# Altium PCB Thread_T21.PcbDoc
Units mm, origin at the board's own origin, x right, y up, seen from the top; angles counter-clockwise.
Board outline 100 x 100 mm, 2 copper layers (Top Layer, Bottom Layer); 49 components, 54 nets, 194 pads, 46 vias.
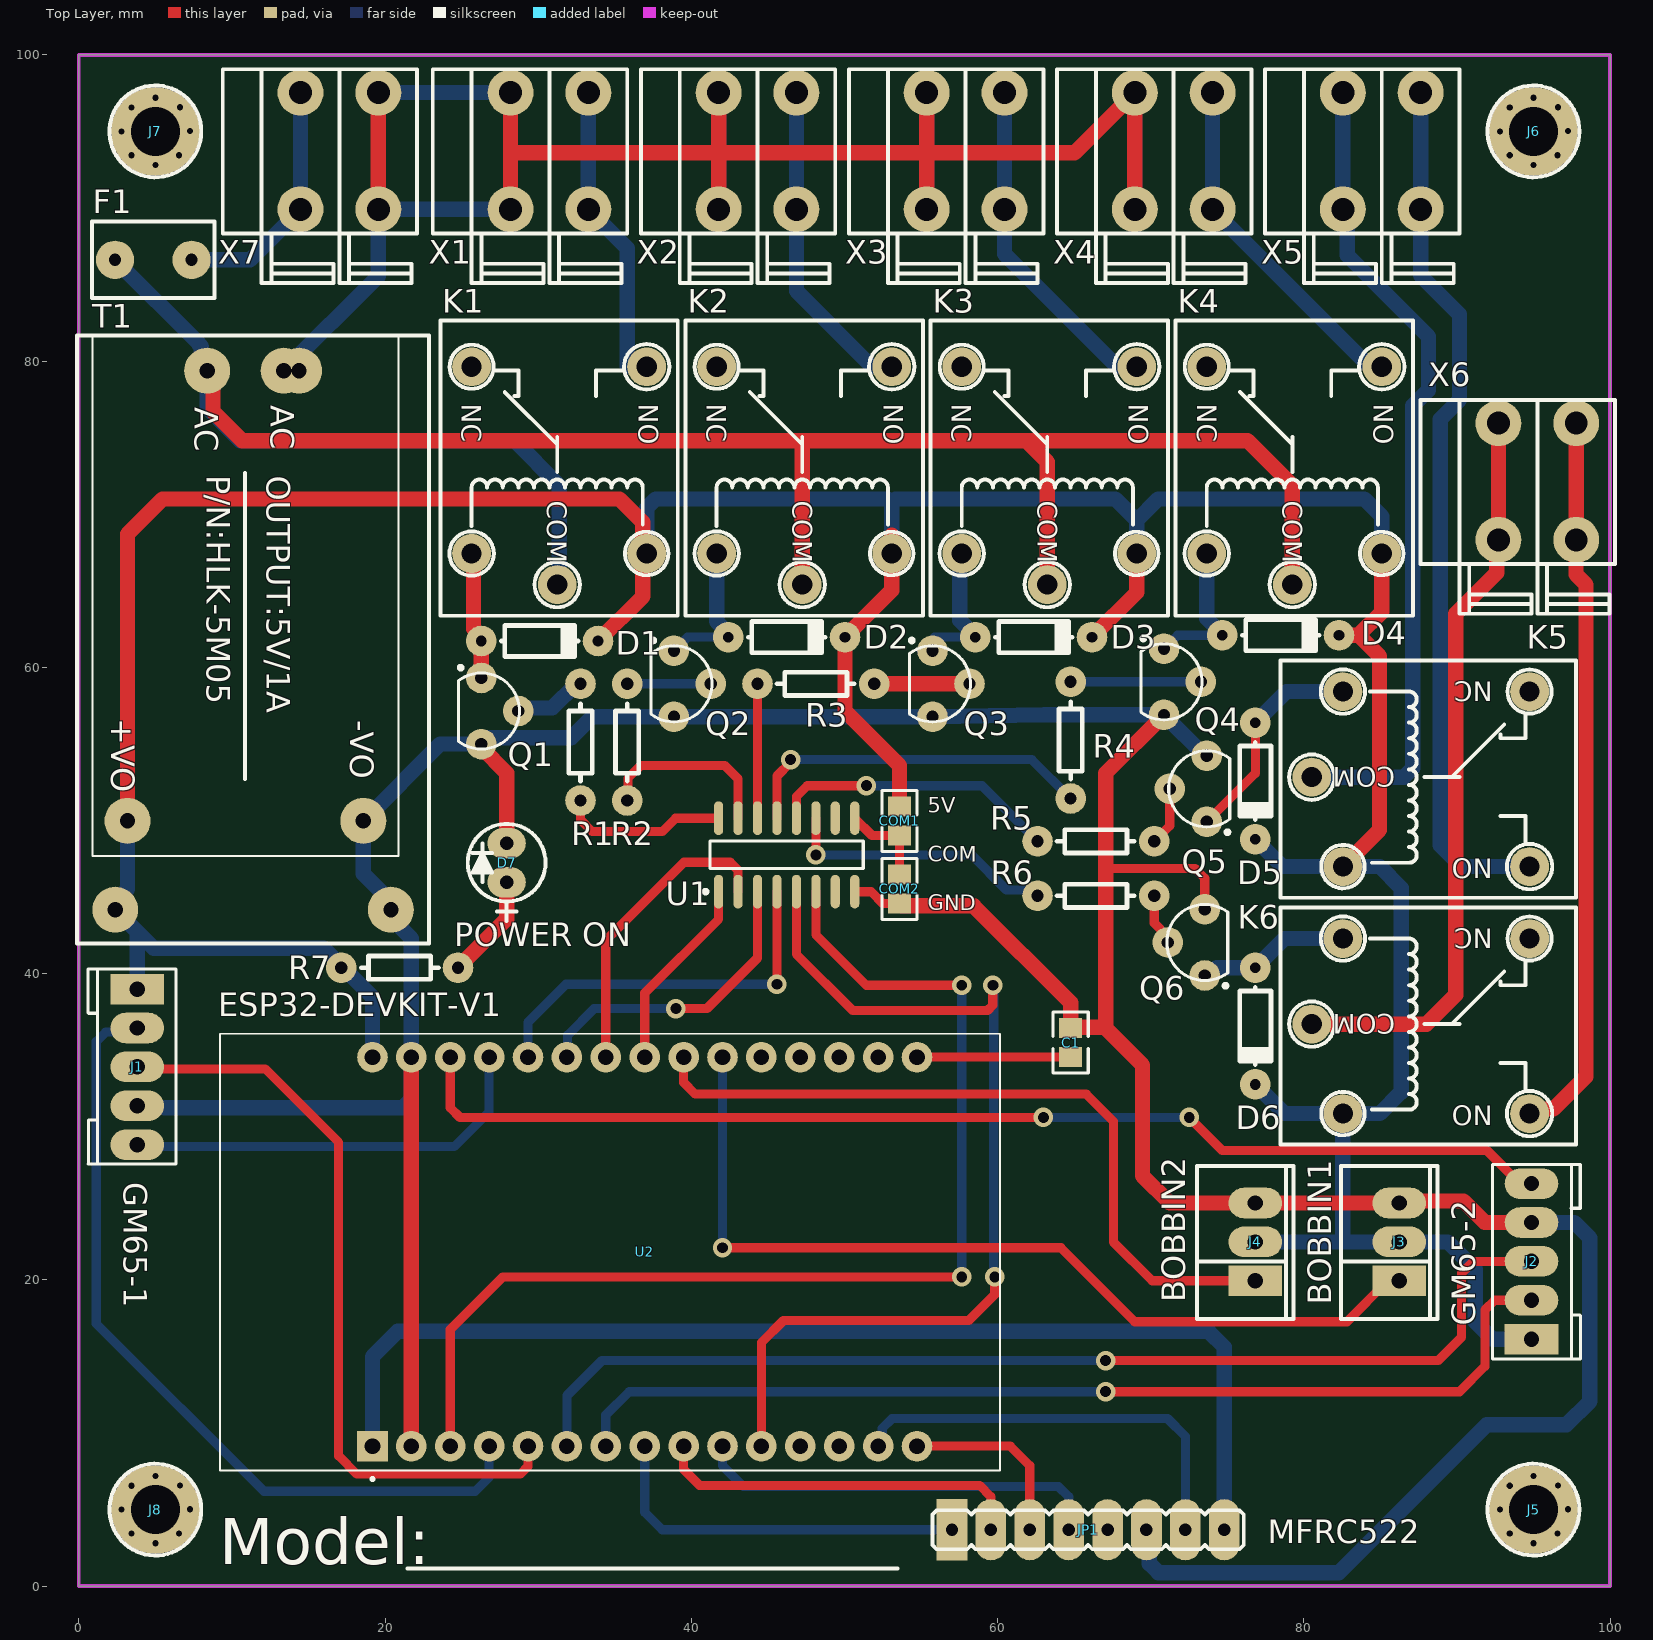
[diagram p0: Top Layer view]
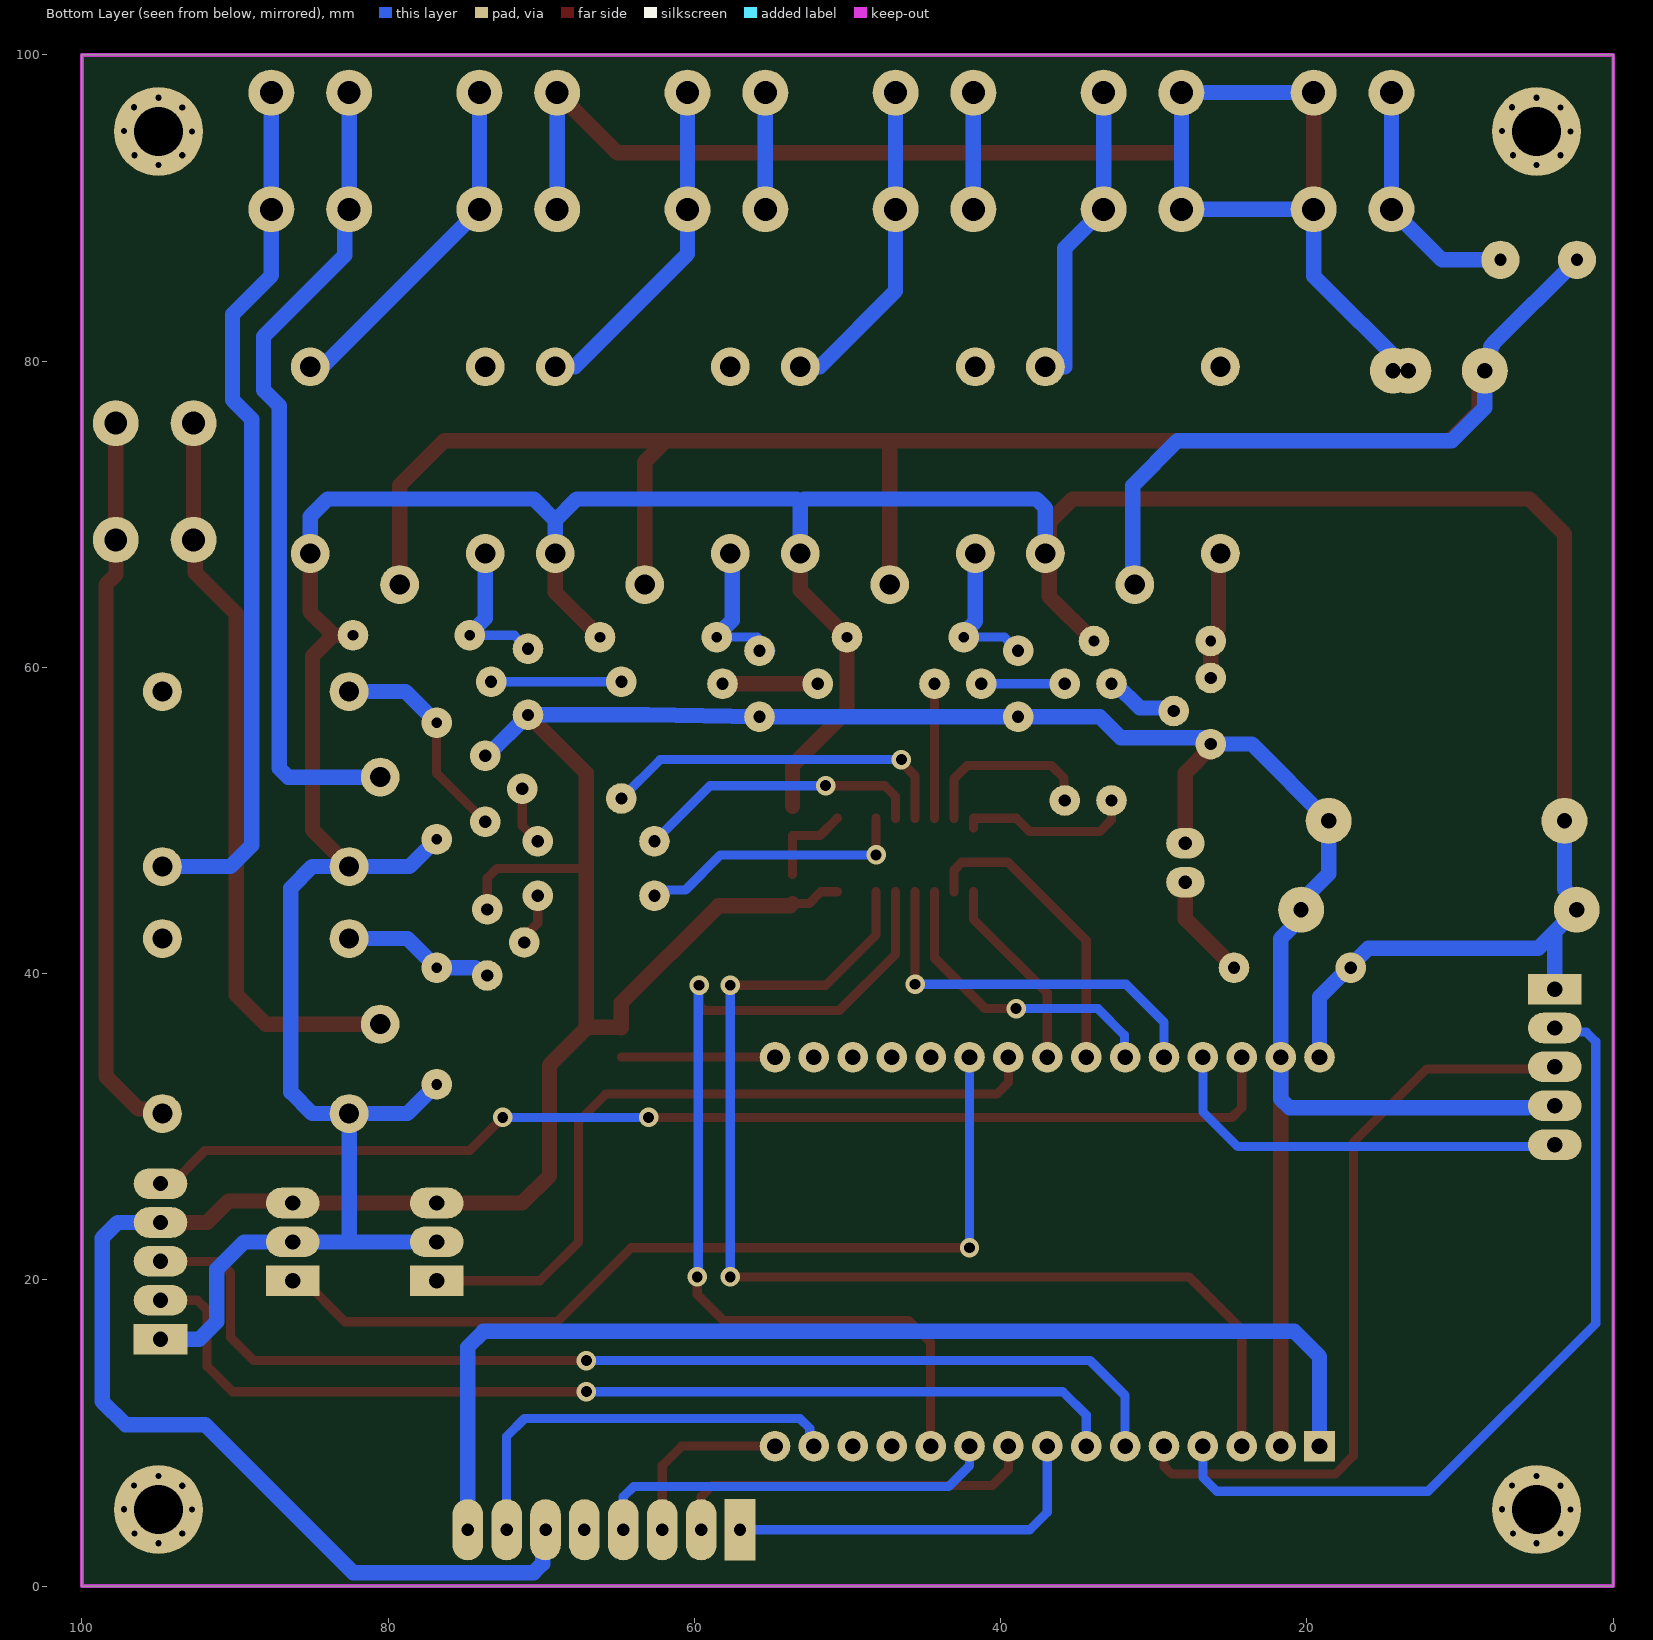
[diagram p1: Bottom Layer view, seen from below]
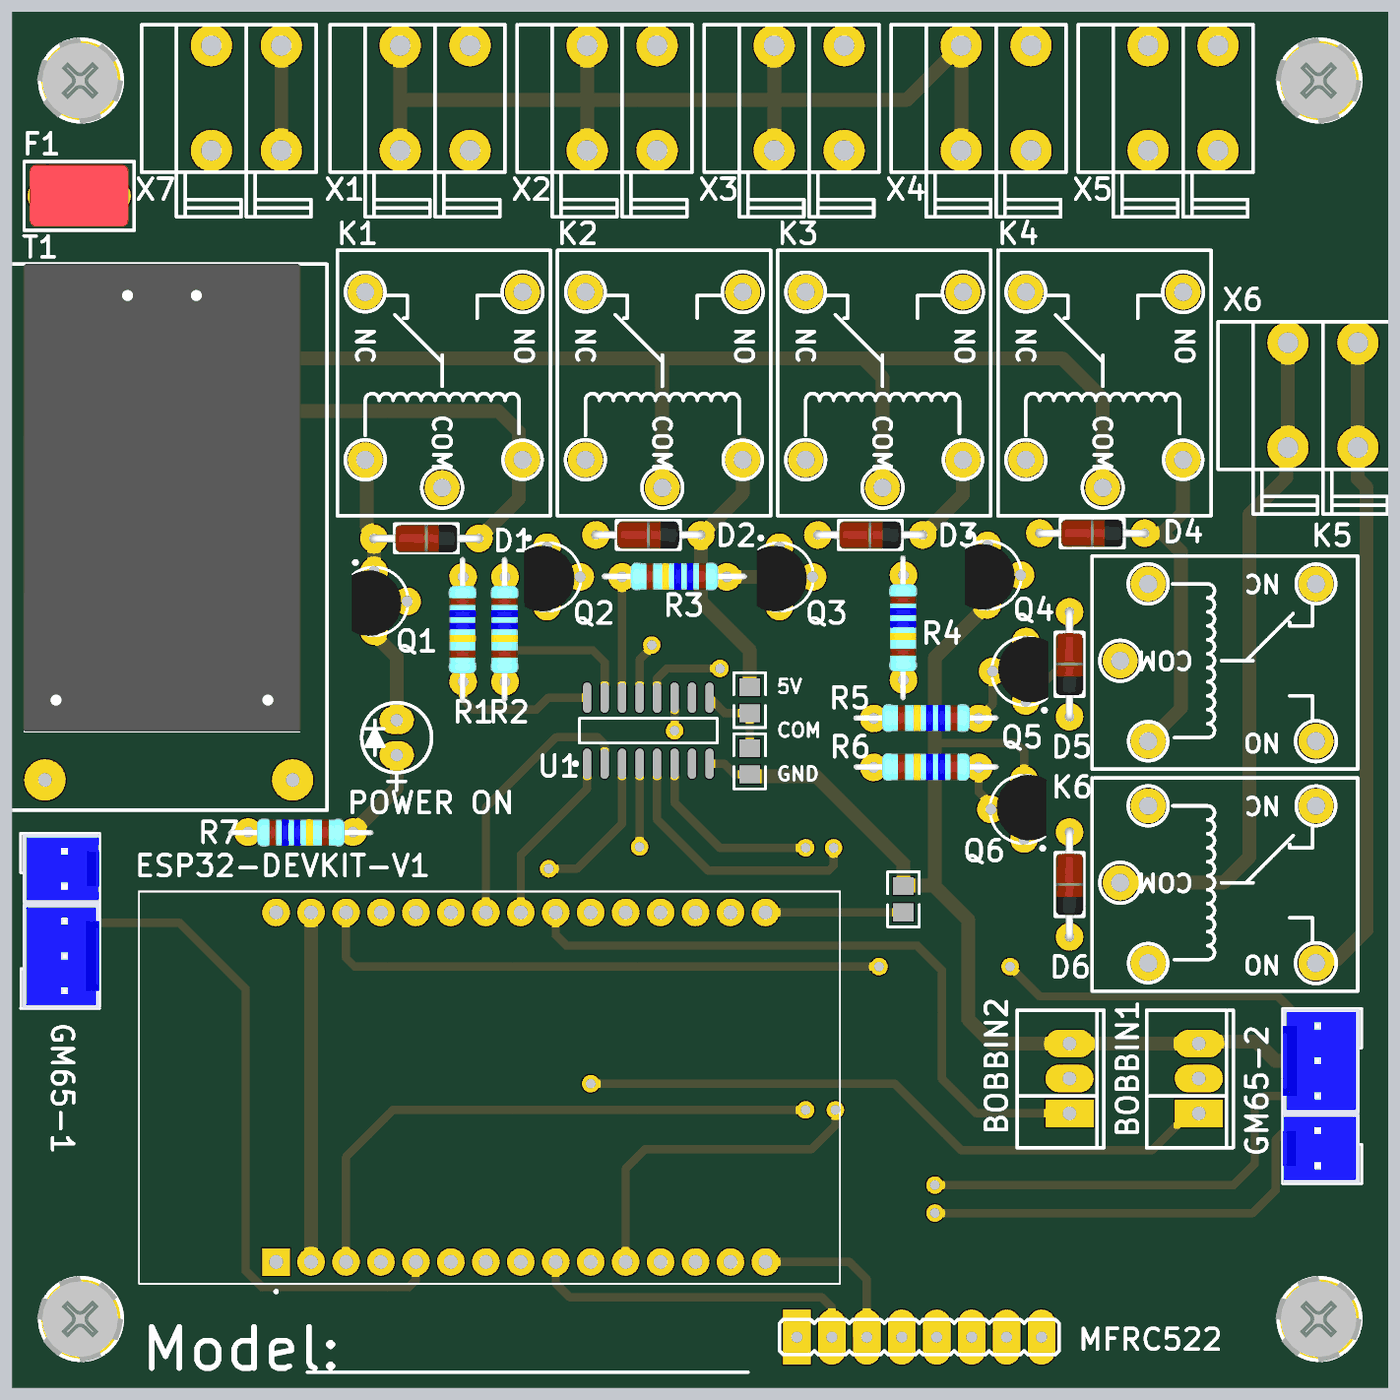
[diagram p2: 3D render of the assembled board from above, using the file's embedded part models]

## Layer stack, top to bottom
Top Solder: solder mask 0.0102, Solder Resist, Dk 3.5
Top Layer: signal copper 0.0356
Dielectric 1: dielectric 0.32, FR-4, Dk 4.8
Bottom Layer: signal copper 0.0356
Bottom Solder: solder mask 0.0102, Solder Resist, Dk 3.5

## Board outline
0,0 0,100 100,100 100,0

## Design rules (kind name [scope] priority, off if disabled: settings)
Clearance AC_CLEAR [InNetClass('AC_POWER')] p1: gap=0.5 ignorepadtopadclearanceinfootprint=FALSE
Clearance [All] p2: gap=0.254 ignorepadtopadclearanceinfootprint=FALSE
PolygonConnect [All] p1: connectstyle=Relief reliefconductorwidth=0.254 reliefentries=4 polygonreliefangle="90 Angle" airgapwidth=0.254
RoutingVias [All] p1: holewidth=0.711 width=1.27 viastyle="Through Hole" minholewidth=0.711 minwidth=1.27 maxholewidth=0.711 maxwidth=1.27
SolderMaskExpansion [All] p1: expansion=0.102 istentingtop=FALSE
Width AC [InNetClass('AC_POWER')] p1: maxlimit=1.2 minlimit=0.254 preferedwidth=1 minimp=50.000000 maximp=50.000000 favimp=50.000000
Width DQ [InNetClass('DQ')] p2: maxlimit=1 minlimit=0.254 preferedwidth=1 minimp=50.000000 maximp=50.000000 favimp=50.000000
Width DC [InNetClass('DC_POWER')] p3: maxlimit=2 minlimit=0.254 preferedwidth=1 minimp=50.000000 maximp=50.000000 favimp=50.000000
Width all [All] p4: maxlimit=1 minlimit=0.254 preferedwidth=0.6 minimp=50.000000 maximp=50.000000 favimp=50.000000
30 further rules are at their usual default settings.

## Components (designator, comment, footprint, x,y, rotation, side; value= is the part's Value field where it differs from the comment)
C1 "1n" CR2012-0805 64.77,35.503 r270 top
COM1 "" CR2012-0805 53.594,49.968 r90 top value=1n
COM2 "" CR2012-0805 53.594,45.536 r270 top value=1n
D1 "1N4148" D4148 26.289,61.722 r180 top
D2 "1N4148" D4148 42.418,61.976 r180 top
D3 "1N4148" D4148 58.547,61.976 r180 top
D4 "1N4148" D4148 74.676,62.103 r180 top
D5 "1N4148" D4148 76.835,56.388 r90 top
D6 "1N4148" D4148 76.835,40.386 r90 top
D7 "POWER ON" LED 27.94,47.244 r90 top
F1 "1A" CAP5W 7.366,86.584 r0 top locked
J1 "GM65-1" CONNECT_2.54_(5) 3.81,38.989 r270 top
J2 "GM65-2" CONNECT_2.54_(5) 94.869,16.129 r90 top
J3 "BOBBIN1" CONNECT_W(3) 86.233,19.939 r90 top value=J3
J4 "BOBBIN2" CONNECT_W(3) 76.835,19.939 r90 top value=J3
J5 "M3" PAD 95,5 r0 top locked
J6 "M3" PAD 95,95 r0 top locked
J7 "M3" PAD 5,95 r0 top locked
J8 "M3" PAD 5,5 r0 top locked
JP1 "MFRC522" SIP8 57.023,3.683 r0 top locked value=JP7
K1 "Relay" RELAY1CON_REV 31.242,65.405 r270 top
K2 "Relay" RELAY1CON_REV 47.244,65.405 r270 top
K3 "Relay" RELAY1CON_REV 63.246,65.405 r270 top
K4 "Relay" RELAY1CON_REV 79.248,65.405 r270 top
K5 "Relay" RELAY1CON_REV 80.518,52.832 r180 top locked
K6 "Relay" RELAY1CON_REV 80.518,36.703 r180 top
Q1 "BC547" TO-92 26.289,57.15 r180 top
Q2 "BC547" TO-92 38.862,58.928 r180 top
Q3 "BC547" TO-92 55.753,58.928 r180 top
Q4 "BC547" TO-92 70.866,59.055 r180 top
Q5 "BC547" TO-92 73.66,52.07 r0 top
Q6 "BC547" TO-92 73.533,42.037 r0 top
R1 "500" R1/8 32.766,58.928 r270 top value=1K
R2 "500" R1/8 35.814,58.928 r270 top value=1K
R3 "500" R1/8 51.943,58.928 r180 top value=1K
R4 "500" R1/8 64.77,59.055 r270 top value=1K
R5 "500" R1/8 70.231,48.641 r180 top value=1K
R6 "500" R1/8 70.231,45.085 r180 top value=1K
R7 "100" R1/8 17.145,40.386 r0 top value=1K
T1 "P/N:HLK-5M05" HLK-PM01 13.382,79.375 r0 top
U1 "ULN2003AD" D016_N 46.228,47.752 r90 top
U2 "ESP32-DEVKIT-V1" ESP32-30PIN 19.177,9.144 r180 top locked
X1 "LAMP-G1" KF142V-5.08-P2 28.194,89.916 r0 top locked
X2 "LAMP-G2" KF142V-5.08-P2 41.783,89.916 r0 top locked
X3 "LAMP-R1" KF142V-5.08-P2 55.372,89.916 r0 top locked
X4 "LAMP-R2" KF142V-5.08-P2 68.961,89.916 r0 top locked
X5 "OUTPUT" KF142V-5.08-P2 82.55,89.916 r0 top locked
X6 "OUTPUT" KF142V-5.08-P2 92.71,68.326 r0 top
X7 "220VAC" KF142V-5.08-P2 14.478,89.916 r0 top locked

## Footprints (in the part's own frame and the unit in brackets; to place one, negate y for a bottom-side part, rotate by r counter-clockwise, add the part's x,y. Pads: shape width x height; smd on the part's side, far side on the other; paste and mask are expansions set on the pad)
CAP5W [mm]
  round 2.5 hole 0.8: 1(0,0.03) 2(-5,0.03)
  silkscreen extent -6.5,-2.47 1.5,2.53, body extent -6.1,-2.2 1.1,2.3, height 5.75
CONNECT_2.54_(5) [mm]
  rect 2x3.5 hole 1: 1(0,0)
  oval 2x3.5 hole 1: 2(2.54,0) 3(5.08,0) 4(7.62,0) 5(10.16,0)
  silkscreen extent -1.3,-3.2 11.42,2.54, body extent -1.27,-3.05 11.43,2.54, height 12.04
CONNECT_W(3) [mm]
  rect 2x3.5 hole 1: 1(0,0)
  oval 2x3.5 hole 1: 2(2.54,0) 3(5.08,0)
  silkscreen extent -2.5,-2.5 7.5,3.8
CR2012-0805 [mm]
  rect 1.3x1.5 smd: 1(-0.946,0) 2(0.954,0)
  silkscreen extent -2,-1.15 2,1.15, body extent -1.52,-0.7 1.52,0.7, height 0.76
D016_N [mm] "SOIC, 16-Leads, Body 9.9x3.9mm, Pitch 1.27mm, IPC Medium Density"
  oval 2.2x0.6 smd: 1(-2.4,4.445) 2(-2.4,3.175) 3(-2.4,1.905) 4(-2.4,0.635) 5(-2.4,-0.635) 6(-2.4,-1.905) 7(-2.4,-3.175) 8(-2.4,-4.445) 9(2.4,-4.445) 10(2.4,-3.175) 11(2.4,-1.905) 12(2.4,-0.635) 13(2.4,0.635) 14(2.4,1.905) 15(2.4,3.175) 16(2.4,4.445)
  silkscreen extent -2.52,-5 0.9,5.42, body extent -2,-5 2,5, height 1.75
D4148 [mm]
  round 2 hole 0.7: A(0,0) K(-7.62,0)
  silkscreen extent -6.32,-1.02 -1.3,1.02, body extent -7.88,-1 0.28,1, height 2.09
ESP32-30PIN [mm]
  rect 2x2 / inner round 2 / far side rect 2x2 hole 1.02: 1(0,0)
  round 2 hole 1.02: 2(-2.54,0) 3(-5.08,0) 4(-7.62,0) 5(-10.16,0) 6(-12.7,0) 7(-15.24,0) 8(-17.78,0) 9(-20.32,0) 10(-22.86,0) 11(-25.4,0) 12(-27.94,0) 13(-30.48,0) 14(-33.02,0) 15(-35.56,0) 16(-35.56,-25.4) 17(-33.02,-25.4) 18(-30.48,-25.4) 19(-27.94,-25.4) 20(-25.4,-25.4) 21(-22.86,-25.4) 22(-20.32,-25.4) 23(-17.78,-25.4) 24(-15.24,-25.4) 25(-12.7,-25.4) 26(-10.16,-25.4) 27(-7.62,-25.4) 28(-5.08,-25.4) 29(-2.54,-25.4) 30(0,-25.4)
  silkscreen extent -40.99,-26.93 9.96,2.25, body extent -41.17,-26.8 10.33,1.5, height 15
HLK-PM01 [mm]
  round 3 hole 1: 1(0,0) 2(-5,0) 3(5.2,-29.4) 4(-10.2,-29.4)
  silkscreen extent -12.5,-31.7 7.5,2.3, body extent -12.6,-31.7 7.6,2.3, height 15
KF142V-5.08-P2 [mm]
  round 3 hole 1.5: 1(0,0) 1(0,7.62) 2(5.08,0) 2(5.08,7.62)
  silkscreen extent -5.08,-4.83 7.62,9.14
LED [mm]
  oval 2x2.5 hole 0.9: 1(-1.27,0) 2(1.27,0)
  silkscreen extent -3.81,-2.54 2.54,2.54
PAD [mm]
  round 5.8 hole 3.2: 0(0,0)
  silkscreen extent -3,-3 3,3, body extent -4.38,-4.32 4.25,4.31, height 1
R1/8 [mm]
  round 2 hole 0.8: 1(0,0) 2(7.62,0)
  silkscreen extent 1.3,-0.76 6.35,0.76, body extent -1.46,-1.05 9.11,0.98, height 2.29
RELAY1CON_REV [mil]
  round 100 hole 52: 1(0,0) 2(-560,-220) 3(-560,230) 4(-80,230) 5(-80,-220)
  silkscreen extent -679,-300 80,310
SIP8 [mm]
  rect 2x4 hole 0.813: 1(0,0)
  oval 2x4 hole 0.813: 2(2.54,0) 3(5.08,0) 4(7.62,0) 5(10.16,0) 6(12.7,0) 7(15.24,0) 8(17.78,0)
  silkscreen extent -1.27,-1.27 19.05,1.27
TO-92 [mm]
  round 2 hole 0.8: 1(0,-2.159) 2(-2.413,0) 3(0,2.159)
  silkscreen extent -2.48,-2.95 1.5,2.48, body extent -2,-2.25 1.65,2.51, height 7.62

## Part data
C1 COM1 COM2: library part Cap, "Capacitor", LatestRevisionDate=17-Jul-2002, LatestRevisionNote="Re-released for DXP Platform.", PackageDescription="Radial Cap, Thru-Hole; 2 Leads; 0.3 in Pin Spacing", PackageReference=RAD-0.3, Published=8-Jun-2000, Publisher="Altium Limited"
D1 D2 D3 D4 D5 D6: library part Diode, "Default Diode", Code_JEDEC=DO-214-AB, LatestRevisionDate=17-Jul-2002, LatestRevisionNote="Re-released for DXP Platform.", PackageDescription="DO-214-AB/SMC; 2 C-Bend Leads; Body 7.9 x 5.9 mm, inc. leads (LxW)", PackageReference=SMC, PackageVersion=Sep-1996, Published=8-Jun-2000, Publisher="Altium Limited"
D7: library part LED0, "Typical INFRARED GaAs LED", LatestRevisionDate=08-Jul-2005, LatestRevisionNote="Mech Layer 1 removed.", PackageDescription="LED; 2 Leads", PackageReference=LED-0, Published=8-Jun-2000, Publisher="Altium Limited"
F1: library part "Fuse 2", "Fuse", LatestRevisionDate=17-Jul-2002, LatestRevisionNote="Re-released for DXP Platform.", PackageDescription="Thru-Hole; 2 Leads", PackageReference=PIN-W2/E2.8, Published=8-Jun-2000, Publisher="Altium Limited"
J1 J2: library part JP5
J3 J4: library part JP3, "Jumper 3"
J5 J6 J7 J8: library part Socket, "Socket", LatestRevisionDate=17-Jul-2002, LatestRevisionNote="Re-released for DXP Platform.", Publisher="Altium Limited"
JP1: library part JP8, "JP8 PIN"
K1 K2 K3 K4 K5 K6: "SPDT Relay", LatestRevisionDate=17-Jul-2002, LatestRevisionNote="Re-released for DXP Platform.", PackageReference=MODULE5B, Published=8-Jun-2000, Publisher="Altium Limited"
Q1 Q2 Q3 Q4 Q5 Q6: library part 2N3904, "NPN General Purpose Amplifier", ComponentLink1Description="Manufacturer Link", ComponentLink1URL=http://www.fairchildsemi.com/, ComponentLink2Description=Datasheet, ComponentLink2URL=http://www.fairchildsemi.com/ds/2N%2F2N3904.pdf, DatasheetVersion=1997, LatestRevisionDate=15-Jan-2003, LatestRevisionNote="PCB Footprint 'BCY-W3/D4.7' replaced", PackageDescription="TO, Flat Index; 3 In-Line, Axial Leads; Body Dia. 4.5mm; Leads 0.51 x 0.48 mm (max)", PackageReference=TO-92A, PackageVersion=Sep-1998, Published=8-Jun-2000, Publisher="Altium Limited"
R1 R2 R3 R4 R5 R6 R7: library part Res1, "Resistor", LatestRevisionDate=17-Jul-2002, LatestRevisionNote="Re-released for DXP Platform.", PackageDescription="Axial Device, Thru-Hole; 2 Leads; 0.3 in Pin Spacing", PackageReference=AXIAL-0.3, Published=8-Jun-2000, Publisher="Altium Limited"
T1: library part Trans, "Transformer", LatestRevisionDate=08-Jul-2005, LatestRevisionNote="Mech Layer 1 removed.", PackageDescription="Transformer; 4 Leads", PackageReference=TRANS, Published=24-Mar-1999, Publisher="Altium Limited"
U1: "Darlington Transistor Array", Code_IPC=SOIC127P600-16, ComponentLink1Description="Manufacturer Link", ComponentLink1URL=http://www.ti.com/, ComponentLink2Description=Datasheet, ComponentLink2URL=http://www-s.ti.com/sc/ds/uln2002a.pdf, DatasheetVersion=Sep-1986, LatestRevisionDate=13-Apr-2006, LatestRevisionNote="IPC-7351 Footprint Added.", PackageDescription="16-Pin Small Outline Integrated Circuit 1.27 mm Pitch", PackageReference=D016, PackageVersion=Jan-1998, Published=15-May-2002, Publisher="Altium Limited"
U2: "Dual core, Wi-Fi: 2.4 GHz up to 150 Mbits/s,BLE (Bluetooth Low Energy) and legacy Bluetooth, 32 bits, Up to 240 MHz"
X1 X2 X3 X4 X5 X6 X7: library part JP2, "WR-PHD 2.54 mm Angled Socket Header", Manufacturer="W¨¹rth Elektronik eiSos GmbH", partNo=613002143121, ComponentLink1 Description=Manufacturer, ComponentLink1URL=http://www.we-online.com, ComponentLink2 Description=Datasheet, ComponentLink2URL=http://katalog.we-online.de/em/datasheet/6130xx143121.pdf, Created by="Karrer Zheng", Created Date="29 March 2013", NoPins=02

## Free pads (board coordinates)
  round 3 hole 1: 1(14.382,79.375) 2(8.382,79.375) 3(20.382,44.175) 4(2.382,44.175)

## Via types
v1: diameter 1, hole 0.4, Top Layer to Bottom Layer, 32 vias
v2: diameter 1.27, hole 0.711, Top Layer to Bottom Layer, 14 vias

## Nets (pads, with @x,y where several pads share a name; then routed paths per layer and width w, separated by ;. In a path a pad name is that pad's centre, name@x,y a point inside that pad or via, vN(x,y) a via of type N, cw(c..) or ccw(c..) an arc to the next point about the centre after c; other vN are vias at no path point)
3V3: JP1.8 U2.1 | length 74.5
  Bottom Layer w1: U2.1 19.177,14.986 20.828,16.637 73.787,16.637 74.803,15.621 JP1.8
5V: COM1.2 D1.K D2.K D3.K D4.K D5.K D6.K J1.1 J2.1 J3.2 J4.2 K1.4 K2.4 K3.4 K4.4 K5.4 K6.4 pad.4 R7.1 T1.4 U2.30 | length 274.2
  Top Layer w1: T1.4 3.182,68.714 5.461,70.993 35.306,70.993 36.83,69.469 36.83,64.643 D1.K ; K2.4@53.086,68.622 53.086,65.024 D2.K 50.038,57.143 53.594,53.587 COM1.2 ; D3.K 69.088,64.897 K3.4@69.088,67.418 ; D4.K 83.566,62.103 85.09,63.627 K4.4 ; K5.4 84.938,49.378 84.938,60.731 83.699,61.97
  Bottom Layer w1: T1.4 3.182,45.516 2.382,44.716 pad.4 3.81,42.747 ; J1.1 3.81,42.747 ; U2.30 19.177,38.481 16.002,41.656 4.901,41.656 3.81,42.747 ; K1.4@37.084,66.695 37.084,70.407 37.67,70.993 52.832,70.993 53.086,70.739 K2.4 ; 53.34,70.993 67.691,70.993 69.088,69.596 ; K3.4 69.088,69.596 ; J4.2 82.804,22.479 ; D6.K 78.74,30.861 K6.4 ; D5.K 78.613,46.99 84.963,46.99 86.36,45.593 86.36,32.258 84.963,30.861 K6.4 ; K4.4 85.09,69.85 83.947,70.993 70.485,70.993 69.088,69.596 ; J2.1 92.329,16.129 91.186,17.272 91.186,20.701 89.408,22.479 J3.2 82.804,22.479 ; K6.4 82.55,22.733 82.804,22.479
BOBBIN1_PIN: J3.1 U2.21 | length 59.7
  Top Layer w0.6: v2(42.037,22.098) 64.135,22.098 68.961,17.272 82.816,17.272 85.483,19.939 J3.1
  Bottom Layer w0.6: v2(42.037,22.098) U2.21
BOBBIN2_PIN: J4.1 U2.22 | length 49.3
  Top Layer w0.6: U2.22 39.497,32.893 40.259,32.131 65.786,32.131 67.564,30.353 67.564,22.479 70.104,19.939 J4.1
  Bottom Layer w0.6: U2.22 U2.22@39.733,34.78
DQ1: K1.3 X1.2 | length 19
  Bottom Layer w1: X1.2@33.274,97.536 33.274,89.916 35.814,87.376 K1.3@35.814,79.629
DQ1_COM: K5.1 X5.1 | length 53.7
  Bottom Layer w1: K5.1 86.536,52.832 87.122,53.418 87.122,77.089 88.138,78.105 88.138,81.612 82.834,86.916 82.834,89.632 82.55,89.916 X5.1@82.55,97.536
DQ1_NO: K5.3 X5.2 | length 57.3
  Bottom Layer w1: X5.2@87.63,97.536 87.63,89.916 87.63,85.598 90.17,83.058 90.17,77.47 88.9,76.2 88.9,48.387 90.297,46.99 K5.3 K5.3@94.869,46.863
DQ2: K2.3 X2.2 | length 20
  Bottom Layer w1: X2.2@46.863,97.536 46.863,89.916 46.863,84.582 K2.3@51.816,79.629
DQ2_COM: K6.1 X6.1 | length 48.7
  Top Layer w1: K6.1 88.011,36.703 89.916,38.608 89.916,63.5 92.605,66.189 92.605,68.221 92.71,68.326 X6.1@92.71,75.946
DQ2_NO: K6.3 X6.2 | length 47.6
  Top Layer w1: K6.3 95.037,31.156 96.307,31.156 98.425,33.274 98.425,65.405 97.768,66.062 97.768,68.304 97.79,68.326 X6.2@97.79,75.946
DQ3: K3.3 X3.2 | length 21
  Bottom Layer w1: X3.2@60.452,97.536 60.452,89.916 60.452,86.995 K3.3@67.818,79.629
DQ4: K4.3 X4.2 | length 22
  Bottom Layer w1: X4.2@74.041,97.536 74.041,89.916 K4.3@84.201,79.756
GND: C1.1 COM2.2 D7.2 J1.4 J2.4 J3.3 J4.3 JP1.6 pad.3 Q1.3 Q2.3 Q3.3 Q4.3 Q5.3 Q6.3 T1.3 U1.8 U2.2 U2.29 | length 268
  Top Layer w0.6: U1.8 51.74,45.352 52.51,44.582 COM2.2 ; 67.056,46.863 72.898,46.863 73.533,46.228 Q6.3
  Top Layer w1: T1.3 T1.3@18.891,50.284 ; pad.3@20.382,43.924 pad.3 ; U2.2 U2.29 ; Q1.3 26.289,54.757 27.94,53.106 D7.2 ; COM2.2 53.744,44.432 58.438,44.432 64.77,38.1 C1.1@64.77,36.506 ; C1.1 C1.1@64.77,36.506 ; Q4.3 67.056,53.086 67.056,46.863 67.056,36.576 66.986,36.506 ; J2.4 91.821,23.749 90.424,25.146 86.36,25.146 J3.3 J4.3 71.247,25.019 69.469,26.797 69.469,34.022 66.986,36.506 ; C1.1@64.77,36.506 66.986,36.506
  Bottom Layer w1: 5.588,31.242 21.131,31.242 21.717,31.828 U2.29 21.717,42.299 20.382,43.634 pad.3 20.382,44.716 18.582,46.516 T1.3 23.598,54.991 Q1.3 ; Q1.3@26.289,55.396 32.155,55.396 33.528,56.769 Q2.3 54.991,56.769 55.753,56.781 63.068,56.896 Q4.3 73.533,54.229 Q5.3 ; JP1.6 69.914,3.492 69.914,1.467 70.5,0.881 82.288,0.881 91.948,10.541 97.155,10.541 98.679,12.065 98.679,22.733 97.663,23.749 J2.4
L: F1.2 K1.1 K2.1 K3.1 K4.1 pad.2 T1.2 | length 145.8
  Top Layer w1: pad.2 8.765,78.992 8.765,76.706 10.668,74.803 47.244,74.803 ; K2.1@47.244,64.834 47.244,74.803 ; K3.1@63.246,65.328 63.246,73.406 61.849,74.803 ; K4.1 79.248,71.882 76.327,74.803 61.849,74.803 ; 47.244,74.803 61.849,74.803
  Bottom Layer w1: F1.2 7.872,81.108 7.872,81.071 7.999,80.944 7.999,79.758 pad.2 8.382,76.962 10.541,74.803 28.448,74.803 31.369,71.882 K1.1@31.369,65.176
LED_ALARM1_PIN: U1.3 U2.25 | length 20.3
  Top Layer w0.6: v2(38.989,37.719) 41.021,37.719 44.323,41.021 U1.3
  Bottom Layer w0.6: U2.25 31.922,34.589 31.922,35.986 33.655,37.719 v2(38.989,37.719)
LED_ALARM2_PIN: U1.4 U2.26 | length 25.6
  Top Layer w0.6: v2(45.593,39.306) U1.4
  Bottom Layer w0.6: U2.26 29.337,36.83 31.813,39.306 v2(45.593,39.306)
LED_READY1_PIN: U1.1 U2.23 | length 12.8
  Top Layer w0.6: U2.23 36.957,38.735 41.783,43.561 U1.1
LED_READY2_PIN: U1.2 U2.24 | length 20
  Top Layer w0.6: U2.24 34.417,42.164 39.522,47.269 42.545,47.269 43.053,46.761 U1.2
MACHINE_OUT1_PIN: U1.5 U2.11 | length 63.4
  Top Layer w0.6: U2.11 44.577,15.905 46.022,17.35 58.117,17.35 59.817,19.05 v2(59.817,20.193) ; U1.5 46.863,41.275 50.546,37.592 59.339,37.592 59.69,37.943 v2(59.69,39.243)
  Bottom Layer w0.6: v2(59.69,39.243) 59.753,39.179 59.753,20.256 v2(59.817,20.193)
MACHINE_OUT2_PIN: U1.6 U2.3 | length 75.2
  Top Layer w0.6: U2.3 24.257,16.764 27.686,20.193 v2(57.658,20.193) ; U1.6 48.133,42.545 51.435,39.243 v2(57.658,39.243)
  Bottom Layer w0.6: v2(57.658,20.193) v2(57.658,39.243)
N: pad.1 T1.1 X1.1 X2.1 X3.1 X4.1 X7.2 | length 141.3
  Top Layer w1: X7.2@19.558,89.916 X7.2@19.558,97.536 ; X1.1@28.194,89.916 28.194,93.599 ; X1.1@28.194,97.536 28.194,93.599 ; X2.1@41.783,89.916 41.783,93.599 ; X2.1@41.783,97.536 41.783,93.599 ; X3.1@55.372,89.916 55.372,93.599 ; X3.1@55.372,97.536 55.372,93.599 ; X4.1@68.961,89.916 68.961,97.536 65.024,93.599 55.372,93.599 ; 28.194,93.599 41.783,93.599 ; 41.783,93.599 55.372,93.599
  Bottom Layer w1: T1.1 19.558,85.551 19.558,89.916 28.194,89.916 28.194,97.536 X7.2@19.558,97.536 ; X2.1@41.783,89.916 X2.1@41.783,97.536 ; X3.1@55.372,89.916 X3.1@55.372,97.536 ; X4.1@68.961,89.916 X4.1@68.961,97.536
NetC1_2: C1.2 U2.16 | length 10
  Top Layer w0.6: U2.16 54.74,34.547 64.767,34.547 C1.2
NetCOM1_1: COM1.1 COM2.1 U1.9 | length 5.9
  Top Layer w0.6: U1.9 51.803,49.022 COM1.1 COM2.1
NetD1_A: D1.A K1.5 Q1.1 | length 8.5
  Top Layer w1: K1.5 25.781,67.31 25.781,62.501 26.289,61.993 Q1.1@26.289,59.225
NetD2_A: D2.A K2.5 Q2.1 | length 10.2
  Bottom Layer w0.6: Q2.1 39.751,61.976 D2.A
  Bottom Layer w1: K2.5@41.656,67.982 41.656,63.009 42.418,62.247 D2.A
NetD3_A: D3.A K3.5 Q3.1 | length 10
  Bottom Layer w0.6: Q3.1@54.991,61.087 55.88,61.976 D3.A
  Bottom Layer w1: K3.5@57.531,67.67 57.531,63.062 58.547,62.046 D3.A
NetD4_A: D4.A K4.5 Q4.1 | length 9.9
  Bottom Layer w0.6: Q4.1 71.755,62.103 D4.A
  Bottom Layer w1: K4.5 73.66,63.189 74.676,62.173 D4.A
NetD5_A: D5.A K5.5 Q5.1 | length 14.3
  Top Layer w0.6: Q5.1 76.835,53.086 D5.A
  Bottom Layer w1: D5.A 78.867,58.42 K5.5
NetD6_A: D6.A K6.5 Q6.1 | length 10
  Bottom Layer w1: Q6.1 73.804,39.878 74.312,40.386 D6.A 78.74,42.291 K6.5
NetD7_1: D7.1 R7.2 | length 6.9
  Top Layer w1: R7.2 27.94,43.561 D7.1
NetF1_1: F1.1 X7.1 | length 16.1
  Bottom Layer w1: F1.1 11.176,86.614 14.478,89.916 X7.1@14.478,97.536
NetQ1_2: Q1.2 R1.1 | length 4.8
  Bottom Layer w1: Q1.2 28.893,57.341 30.909,57.341 32.495,58.928 R1.1
NetQ2_2: Q2.2 R2.1 | length 5.5
  Bottom Layer w0.6: R2.1 Q2.2
NetQ3_2: Q3.2 R3.1 | length 6.2
  Top Layer w1: R3.1 Q3.2
NetQ4_2: Q4.2 R4.1 | length 8.5
  Bottom Layer w0.6: R4.1 Q4.2
NetQ5_2: Q5.2 R5.1 | length 3.8
  Top Layer w0.6: R5.1 71.247,49.657 Q5.2
NetQ6_2: Q6.2 R6.1 | length 3.8
  Top Layer w0.6: R6.1@70.231,45.466 70.231,43.305 71.12,42.416 Q6.2
NetR1_2: R1.2 U1.16 | length 11.6
  Top Layer w0.6: R1.2 32.766,50.038 33.528,49.276 38.1,49.276 38.976,50.152 U1.16 U1.16@41.783,49.53
NetR2_2: R2.2 U1.15 | length 11.9
  Top Layer w0.6: R2.2 35.859,51.353 35.859,52.75 36.703,53.594 42.189,53.594 43.053,52.73 U1.15
NetR3_2: R3.2 U1.14 | length 8.8
  Top Layer w0.6: U1.14 R3.2
NetR4_2: R4.2 U1.13 | length 23.5
  Top Layer w0.6: U1.13 45.593,52.905 46.482,53.794 v2(46.482,53.975)
  Bottom Layer w0.6: v2(46.482,53.975) 62.23,53.975 R4.2
NetR5_2: R5.2 U1.12 | length 19
  Top Layer w0.6: U1.12 46.863,51.562 47.574,52.273 v2(51.435,52.273)
  Bottom Layer w0.6: v2(51.435,52.273) 58.979,52.273 R5.2
NetR6_2: R6.2 U1.11 | length 17.8
  Top Layer w0.6: v2(48.133,47.752) U1.11
  Bottom Layer w0.6: v2(48.133,47.752) 58.293,47.752 60.579,45.466 R6.2@62.611,45.466
QR1_RX_PIN: J1.3 U2.5 | length 49.1
  Top Layer w0.6: J1.3@4.699,33.782 12.167,33.782 16.967,28.981 16.967,8.509 18.161,7.315 28.829,7.315 29.337,7.823 U2.5
QR1_TRIG_PIN: J1.5 U2.27 | length 26.8
  Bottom Layer w0.6: J1.5@4.537,28.702 24.511,28.702 26.797,30.988 U2.27
QR1_TX_PIN: J1.2 U2.4 | length 54.9
  Bottom Layer w0.6: J1.2@4.699,36.322 4.558,36.181 1.764,36.181 1.143,35.56 1.143,17.145 12.09,6.198 25.883,6.198 26.797,7.112 U2.4
QR2_RX_PIN: J2.3 U2.6 | length 72.5
  Top Layer w0.6: v2@66.929,14.732 v2(67.056,14.732) 88.773,14.732 90.297,16.256 90.297,20.447 91.059,21.209 J2.3
  Bottom Layer w0.6: U2.6 31.877,12.446 34.163,14.732 v2(67.056,14.732)
QR2_TRIG_PIN: J2.5 U2.28 | length 76
  Top Layer w0.6: U2.28 24.257,31.242 24.892,30.607 v2(62.992,30.607) ; v2(72.517,30.607) 74.676,28.448 91.96,28.448 94.119,26.289 J2.5
  Bottom Layer w0.6: v2(62.992,30.607) v2(72.517,30.607)
QR2_TX_PIN: J2.2 U2.7 | length 67.7
  Top Layer w0.6: v2(67.056,12.7) 90.17,12.7 91.821,14.351 91.821,18.034 92.456,18.669 J2.2
  Bottom Layer w0.6: U2.7 34.417,11.176 35.941,12.7 v2(67.056,12.7)
RFID_MISO_PIN: JP1.4 U2.10 | length 26.9
  Bottom Layer w0.6: U2.10 42.037,7.874 43.409,6.502 63.983,6.502 64.643,5.842 JP1.4
RFID_MOSI_PIN: JP1.3 U2.15 | length 12.1
  Top Layer w0.6: U2.15 60.833,9.144 62.103,7.874 JP1.3
RFID_RST_PIN: JP1.7 U2.14 | length 27.9
  Bottom Layer w0.6: U2.14 52.465,9.412 52.465,10.301 53.111,10.947 71.095,10.947 72.263,9.779 JP1.7
RFID_SCK_PIN: JP1.2 U2.9 | length 24.5
  Top Layer w0.6: U2.9 39.497,7.62 40.538,6.579 58.826,6.579 59.563,5.842 JP1.2
RFID_SS_PIN: JP1.1 U2.8 | length 24.9
  Bottom Layer w0.6: U2.8 36.957,4.826 38.1,3.683 JP1.1
pads on no net: J5.0 J6.0 J7.0 J8.0 JP1.5 K1.2 K2.2 K3.2 K4.2 K5.2 K6.2 U1.7 U1.10 U2.12 U2.13 U2.17 U2.18 U2.19 U2.20
copper on no net:
  other v1: 5,2.8 95,2.8 3.444,3.444 6.556,3.444 93.444,3.444 96.556,3.444 2.8,5 92.8,5 7.25,5.025 97.25,5.025 3.444,6.556 93.444,6.556 6.606,6.581 96.606,6.581 5,7.2 95,7.2 5,92.8 95,92.8 3.444,93.444 6.556,93.444 93.444,93.444 96.556,93.444 2.8,95 92.8,95 7.25,95.025 97.25,95.025 3.444,96.556 93.444,96.556 6.606,96.581 96.606,96.581 5,97.2 95,97.2

## Keep-outs
Keep-Out Layer:
  the board outline again, w0.254

## Silkscreen, mask and mechanical layers (free items; w line width, h text height)
Top Overlay:
  lines w0.254: -0.127,81.661 22.86,81.661 22.875,81.646 22.875,41.975 -0.125,41.975 -0.125,81.55 ; 21.463,1.143 53.463,1.143
  text "OUTPUT:5V/1A" at 12.283,72.517 h1.52 r270
  text "5V" at 55.445,50.492 h1
  text "COM" at 55.445,47.317 h1
  text "GND" at 55.445,44.142 h1
  text "Model:" at 9.163,1.416 h3

## Text inside footprints (layer, text, board x,y; h text height)
K1: Top Overlay "NO" at 36.576,77.216 h1.27 r270; Top Overlay "NC" at 25.019,77.216 h1.27 r270; Top Overlay "COM" at 30.607,70.866 h1.27 r270
K2: Top Overlay "NO" at 52.578,77.216 h1.27 r270; Top Overlay "NC" at 41.021,77.216 h1.27 r270; Top Overlay "COM" at 46.609,70.866 h1.27 r270
K3: Top Overlay "NO" at 68.58,77.216 h1.27 r270; Top Overlay "NC" at 57.023,77.216 h1.27 r270; Top Overlay "COM" at 62.611,70.866 h1.27 r270
K4: Top Overlay "NO" at 84.582,77.216 h1.27 r270; Top Overlay "NC" at 73.025,77.216 h1.27 r270; Top Overlay "COM" at 78.613,70.866 h1.27 r270
K5: Top Overlay "NO" at 92.329,47.498 h1.27 r180; Top Overlay "NC" at 92.329,59.055 h1.27 r180; Top Overlay "COM" at 85.979,53.467 h1.27 r180
K6: Top Overlay "COM" at 85.979,37.338 h1.27 r180; Top Overlay "NC" at 92.329,42.926 h1.27 r180; Top Overlay "NO" at 92.329,31.369 h1.27 r180
T1: Top Overlay "AC" at 12.533,77.121 h1.52 r270; Top Overlay "AC" at 7.58,76.994 h1.52 r270; Top Overlay "-VO" at 17.74,56.547 h1.52 r270; Top Overlay "+VO" at 2.119,56.674 h1.52 r270